# Altium PCB AX5043_module_pcb.PcbDoc
Units mm, origin at the board's own origin, x right, y up, seen from the top; angles counter-clockwise.
Board outline 60.1 x 40.1 mm, 2 copper layers (Top Layer, Bottom Layer); 59 components, 36 nets, 173 pads, 25 vias.
Unrouted connection lines stored in the file: 6.
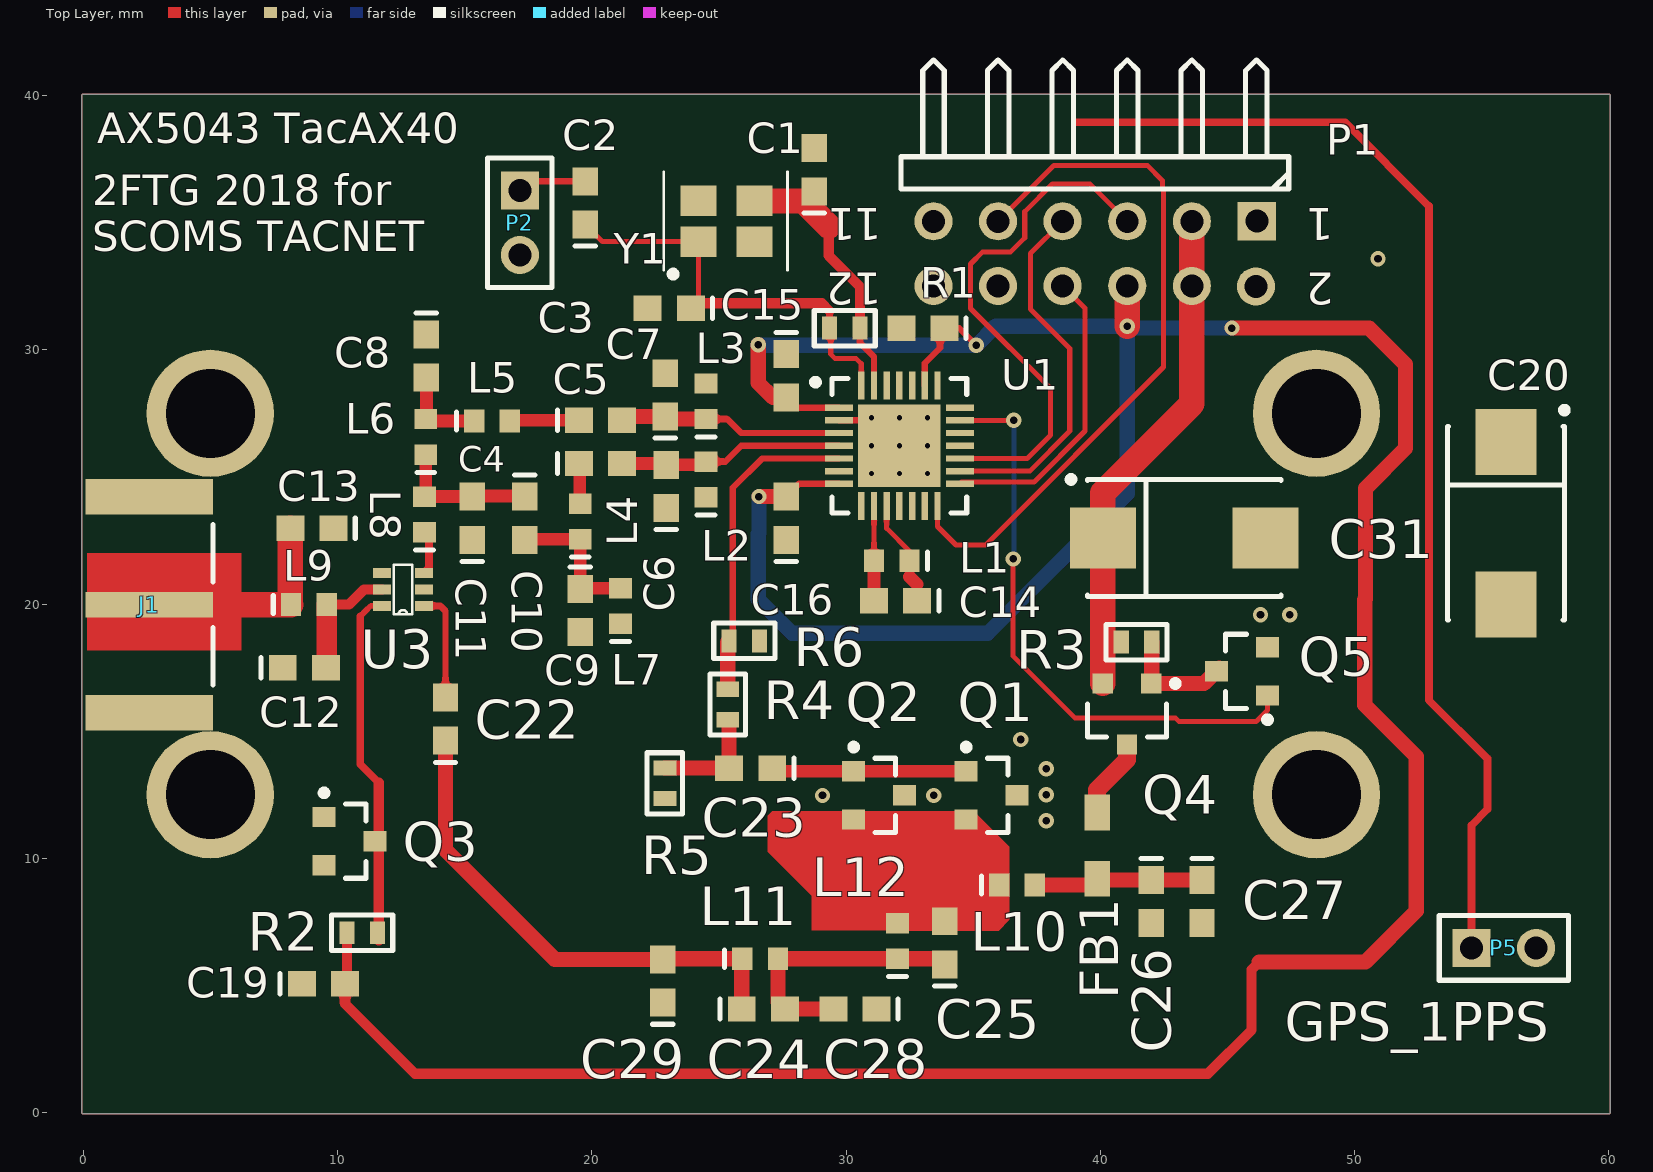
[diagram p0: Top Layer view]
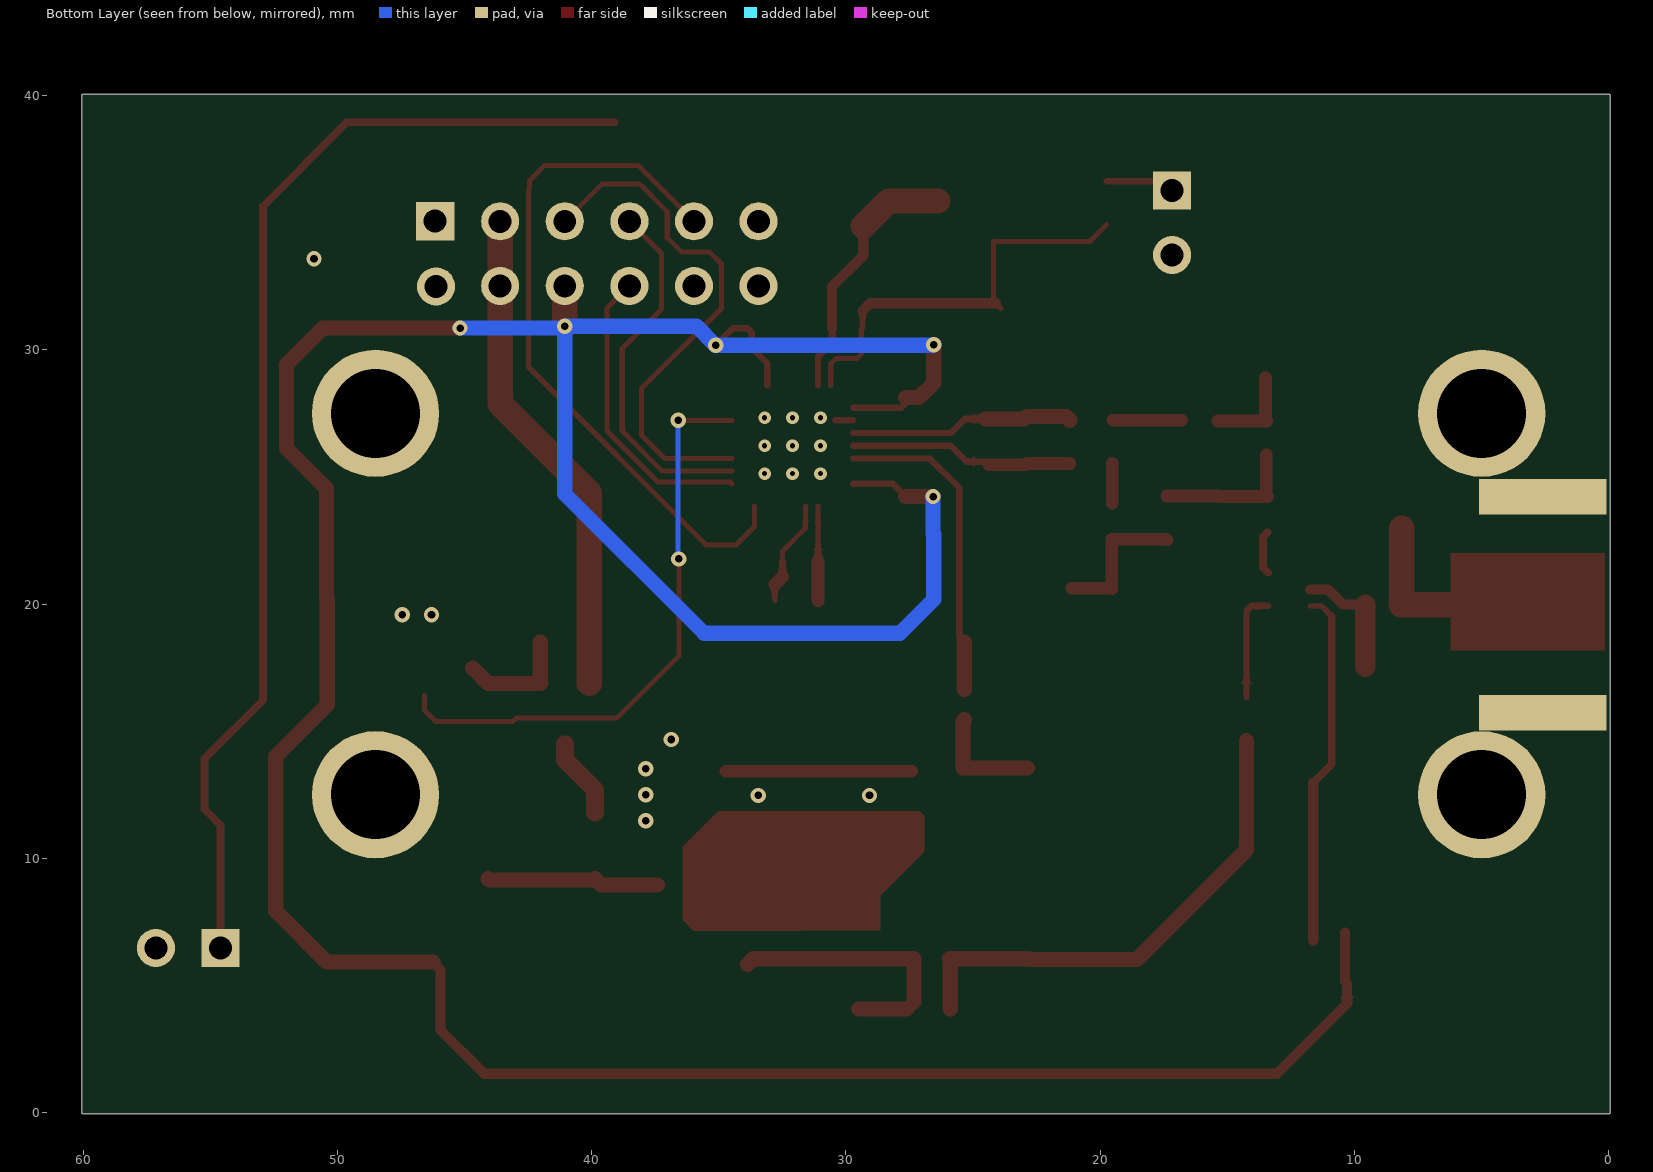
[diagram p1: Bottom Layer view, seen from below]

## Layer stack, top to bottom
Top Solder: solder mask 0.0102, Solder Resist, Dk 3.5
Top Layer: signal copper 0.0356
Dielectric 1: dielectric 0.32, FR-4, Dk 4.8
Bottom Layer: signal copper 0.0356
Bottom Solder: solder mask 0.0102, Solder Resist, Dk 3.5

## Board outline
-0.05,0 ccw(c0,0) 0,-0.05 60,-0.05 ccw(c60,0) 60.05,0 60.05,40 ccw(c60,40) 60,40.05 0,40.05 ccw(c0,40) -0.05,40

## Design rules (kind name [scope] priority, off if disabled: settings)
Clearance [All] p1: gap=0.2 ignorepadtopadclearanceinfootprint=FALSE
PolygonConnect [All] p1: connectstyle=Relief reliefconductorwidth=0.254 reliefentries=4 polygonreliefangle="90 Angle" airgapwidth=0.254
RoutingVias [All] p1: holewidth=0.3 width=0.6 viastyle="Through Hole" minholewidth=0.3 minwidth=0.6 maxholewidth=0.711 maxwidth=1.27
SolderMaskExpansion [All] p1: expansion=0.102
Width [All] p1: maxlimit=4 minlimit=0.15 preferedwidth=0.25
30 further rules are at their usual default settings.

## Classes and differential pairs
component class AX5043_schema: C1 C2 C3 C4 C5 C6 C7 C8 C9 C10 C11 C12 C13 C14 C15 C16 C19 C20 C22 C30 J1 J3 L1 L2 L3 L4 L5 L6 L7 L8 L9 P1 P2 P5 Q3 R1 R2 R4 R5 R6 U1 U3 Y1
component class 40MHz_PA: C23 C24 C25 C26 C27 C28 C29 C31 FB1 L10 L11 L12 Q1 Q2 Q4 Q5 R3

## Components (designator, comment, footprint, x,y, rotation, side; value= is the part's Value field where it differs from the comment)
C1 "C0603" 0603 28.75,37.075 r90 top value=1nF
C2 "C0603" 0603 19.75,35.775 r90 top value=1nF
C3 "C0603" 0603 23.05,31.625 r180 top value=6.8pF
C4 "C0603" 0603 20.35,25.525 r0 top value=10pF
C5 "C0603" 0603 20.35,27.225 r0 top value=10pF
C6 "C0603" 0603 22.925,24.625 r90 top value=10pF
C7 "C0603" 0603 22.9,28.225 r90 top value=10pF
C8 "C0603" 0603 13.5,29.75 r270 top value=12pF
C9 "C0603" 0603 19.55,19.75 r270 top value=0pF
C10 "C0603" 0603 17.375,23.375 r270 top value=12pF
C11 "C0603" 0603 15.3,23.375 r90 top value=75pF
C12 "C0603" 0603 8.7,17.5 r0 top value=100pF
C13 "C0603" 0603 9,22.975 r180 top value=100pF
C14 "C0603" 0603 31.95,20.125 r180 top value=100pF
C15 "C0603" 0603 27.65,28.975 r270 top value=100nF
C16 "C0603" 0603 27.65,23.375 r90 top value=100nF
C19 "C0603" 0603 9.45,5.075 r0 top value=100nF
C20 "T495D" D 55.95,23.175 r270 top value=15uF
C22 "C0603" 0603 14.25,15.475 r90 top value=1nF
C23 "C0603" 0603 26.25,13.55 r180 top value=100nF
C24 "C0603" 0603 26.75,4.075 r0 top value=22pF
C25 "C0603" 0603 33.875,6.675 r90 top value=47pF
C26 "C0603" 0603 42,8.3 r270 top value=100nF
C27 "C0603" 0603 44,8.3 r270 top value=100nF
C28 "C0603" 0603 30.35,4.075 r180 top value=100pF
C29 "C0603" 0603 22.8,5.175 r90 top value=100pF
C30 "C0603" 0603 33.025,30.85 r180 top value=100nF
C31 "T495D" D 43.3,22.6 r0 top value=15uF
FB1 "BLM21BD221SN1D" MURA-BLM21-H1-CHIP-2_V 39.875,10.5 r270 top
J1 "32K145-400L5" ROS-32K145-400L5_V 0.1,19.975 r90 top locked
L1 "Inductor" INDC1608L 31.8,21.7 r180 top value=120nH
L2 "Inductor" INDC1608L 24.5,24.9 r90 top value=150nH
L3 "Inductor" INDC1608L 24.5,27.975 r90 top value=150nH
L4 "Inductor" INDC1608L 19.55,23.25 r90 top value=120nH
L5 "Inductor" INDC1608L 16.075,27.2 r0 top value=120nH
L6 "Inductor" INDC1608L 13.475,26.575 r90 top value=68nH
L7 "Inductor" INDC1608L 21.125,19.925 r90 top value=120nH
L8 "Inductor" INDC1608L 13.425,23.525 r90 top value=270nH
L9 "Inductor" INDC1608L 8.875,19.975 r0 top value=180nH
L10 "Inductor" INDC1608L 36.725,8.95 r0 top value=1uH
L11 "Inductor" INDC1608L 26.625,6.05 r0 top value=150nH
L12 "Inductor" INDC1608L 32.025,6.75 r90 top value=21nH
P1 "Side header" HDR2X6H 46.14,35.05 r180 top
P2 "Header 2" HDR1X2 17.175,36.265 r270 top
P5 "GPS_1PPS" HDR1X2 54.6,6.475 r0 top
Q1 "BSS138LT3G" ONSC-SOT-23-3-318-08_V 35.725,12.475 r0 top
Q2 "BSS138LT3G" ONSC-SOT-23-3-318-08_V 31.3,12.475 r0 top
Q3 "BSS138LT3G" ONSC-SOT-23-3-318-08_V 10.475,10.675 r0 top
Q4 "AO3401A" AO-SOT-23-3L_V 41.05,15.675 r270 top
Q5 "BSS138LT3G" ONSC-SOT-23-3-318-08_V 45.575,17.35 r180 top
R1 "1k 0603" R0603 29.95,30.85 r0 top
R2 "10k" R0603 10.975,7.075 r180 top
R3 "100k" R0603 41.425,18.5 r180 top
R4 "0R" R0603 25.35,16.05 r270 top
R5 "100k" R0603 22.875,12.95 r90 top
R6 "100k" R0603 26,18.55 r180 top
U1 "AX5043-1-TA05" QFN50P500X500X85_HS-29M 32.1,26.225 r0 top
U3 "AS213-92LF" SC70_6 13.4,19.925 r180 top
Y1 "16MHz SMD xtal" FA-238 24.2,34.25 r0 top

## Footprints (in the part's own frame and the unit in brackets; to place one, negate y for a bottom-side part, rotate by r counter-clockwise, add the part's x,y. Pads: shape width x height; smd on the part's side, far side on the other; paste and mask are expansions set on the pad)
0603 [mm] "Chip Capacitor; Body 1.6 x 0.8 mm (LxW typ)"
  rect 1.1x1 smd: 1(-0.85,0) 2(0.85,0)
  silkscreen extent -1.7,-0.4 -1.7,0.4
AO-SOT-23-3L_V [mm] "SOT23, 3-Leads, Body 3.1x1.8mm, Pitch 0.95mm"
  rect 0.8x0.8 smd: 1(-1.2,0.95) 2(-1.2,-0.95) 3(1.2,0)
  silkscreen extent -1.32,-1.55 0.9,2.03, body extent -1.5,-1.55 1.5,1.55, height 1.25
D [mm] "Capacitor, SM Tantalum; Body 7.3 x 4.3 mm (LxW typ)"
  rect 2.6x2.4 smd: 1(-3.2,0) 2(3.2,0)
  silkscreen extent -4.57,-2.3 3.8,2.43
FA-238 [mm] "EPSON 3.20 x 2.50 SMD crystal case"
  rect 1.4x1.2 smd: 1(0,0) 2(2.2,0) 3(2.2,1.6) 4(0,1.6)
  silkscreen extent -1.38,-1.4 3.5,2.75
HDR1X2 [mm] "Connector; Header; 2 Position"
  rect 1.5x1.5 hole 0.9: 1(0,0)
  round 1.5 hole 0.9: 2(2.54,0)
  silkscreen extent -1.27,-1.27 3.81,1.27
HDR2X6H [mm] "Connector; Header; 6x2 Position; Right Angle"
  rect 1.5x1.5 hole 0.9: 1(-0.015,-0.005)
  round 1.5 hole 0.9: 2(0.02,2.56) 3(2.54,0) 4(2.54,2.54) 5(5.08,0) 6(5.08,2.54) 7(7.62,0) 8(7.62,2.54) 9(10.16,0) 10(10.16,2.54) 11(12.7,0) 12(12.7,2.54)
  silkscreen extent -1.27,-6.35 13.97,-1.27
INDC1608L [mm] "Chip Inductor, Body 1.6x0.8mm, IPC High Density"
  rect 0.8x0.9 smd: 1(-0.7,0) 2(0.7,0)
  silkscreen extent -1.4,-0.35 -1.4,0.35, body extent -0.87,-0.48 0.87,0.48, height 0.55
MURA-BLM21-H1-CHIP-2_V [mm] "Chip Ferrite Bead, 2-Leads, Body 2x1.25mm, Height 1.05mm"
  rect 1.4x1 smd: 1(-1.3,0) 2(1.3,0)
  body extent -1,-0.63 1,0.63, height 1.05
ONSC-SOT-23-3-318-08_V [mm] "SOT23, 3-Leads, Body 2.92x1.3mm, Pitch 0.95mm"
  rect 0.9x0.8 smd: 1(-1,0.95) 2(-1,-0.95) 3(1,0)
  silkscreen extent -1.12,-1.46 0.65,2.02, body extent -0.65,-1.46 0.65,1.46, height 1.11
QFN50P500X500X85_HS-29M [mm] "QFN, 28-Leads, Body 5,00x5,00mm, Pitch 0,50mm, Thermal Pad 3,25x3,25mm, IPC Low Density"
  rect 1.1x0.25 smd: 1(-2.375,1.5) 2(-2.375,1) 3(-2.375,0.5) 4(-2.375,0) 5(-2.375,-0.5) 6(-2.375,-1) 7(-2.375,-1.5) 15(2.375,-1.5) 16(2.375,-1) 17(2.375,-0.5) 18(2.375,0) 19(2.375,0.5) 20(2.375,1) 21(2.375,1.5)
  rect 0.25x1.1 smd: 8(-1.5,-2.375) 9(-1,-2.375) 10(-0.5,-2.375) 11(0,-2.375) 12(0.5,-2.375) 13(1,-2.375) 14(1.5,-2.375) 22(1.5,2.375) 23(1,2.375) 24(0.5,2.375) 25(0,2.375) 26(-0.5,2.375) 27(-1,2.375) 28(-1.5,2.375)
  rect 3.25x3.25 smd: 29(0,0)
  silkscreen extent -3.42,-2.65 2.65,2.65, body extent -2.55,-2.55 2.55,2.55, height 0.85
R0603 [mm]
  rect 0.6x0.9 smd: 1(-0.6,0) 2(0.6,0)
  silkscreen extent -1.2,-0.7 1.2,0.7
ROS-32K145-400L5_V [mm] "SMA Right Angle Jack, Edge Mount, 14.25x9.5x4.46mm, Rosenberger Recommended"
  rect 1x5 smd: 1(0,-2.5)
  rect 1.4x5 smd: MP(-4.25,-2.5) MP(4.25,-2.5)
  rect 1.4x5 smd far side paste-2: ""(-4.25,-2.5) ""(4.25,-2.5)
  silkscreen extent -3.15,-5 3.15,-5, body extent -4.75,-4.75 4.75,9.5, height 4.46
SC70_6 [mm]
  rect 0.7x0.4 smd: 1(0,0) 2(0,-0.65) 3(0,-1.3) 4(1.65,-1.3) 5(1.65,-0.65) 6(1.65,0)
  silkscreen extent 0.47,-1.63 1.18,0.33

## Part data
C1 C2 C3 C4 C5 C6 C7 C8 C9 C10 C11 C12 C13 C14 C15 C16 C19 C22 C23 C24 C25 C26 C27 C28 C29 C30: "Ceramic Chip Capacitor - Standard", PackageDocument=Mar-2001, Code_IPC="1608 [0603]", Code_JEITA=0603, ComponentLink1Description="Manufacturer Link", ComponentLink1URL=http://www.kemet.com/, ComponentLink2Description=Datasheet, ComponentLink2URL=http://www.kemet.com/kemet/web/homepage/kechome.nsf/vapubfilesname/F3102TA.pdf/$file/F3102TA.pdf, DatasheetDocument=Mar-2001, LatestRevisionDate=19-Mar-2004, LatestRevisionNote="Silkscreen size reduced.", Note="Footprint corresponds to dimensions for bulk cassette packaging. This case size has tightened tolerances.", PackageReference=0603, Published=17-Jul-2002, Publisher="Altium Limited"
C20 C31: "Solid Tantalum Chip Capacitor, Standard T495 Series - Low ESR, Surge Robust", PackageDocument=Mar-2001, Code_JEITA=7343-31, ComponentLink1Description="Manufacturer Link", ComponentLink1URL=http://www.kemet.com/, ComponentLink2Description=Datasheet, ComponentLink2URL=http://www.kemet.com/kemet/web/homepage/kechome.nsf/vapubfilesname/F3102TA.pdf/$file/F3102TA.pdf, DatasheetDocument=Mar-2001, LatestRevisionDate=19-Mar-2004, LatestRevisionNote="Silkscreen dimensions re-sized.", PackageReference=D, Published=17-Jul-2002, Publisher="Altium Limited"
FB1: library part CMP-0686-00656-2, "Chip Ferrite Bead for High Speed Signal lines, 220 Ohm, 200 mA, -55 to 125 degC, 2 x 1.25 x 1.05 mm SMD, Tape and Reel", DC Resistance="0.25 Ohm Max.", Manufacturer=Murata, Operating Temperature Range="-55 to 125 degC", Rated Current="200 mA", ComponentLink1Description="Manufacturer URL", ComponentLink1URL=http://www.murata.com/, ComponentLink2Description=Datasheet, ComponentLink2URL=http://www.murata.com/products/catalog/pdf/c31e.pdf, ComponentLink3Description="Package Specification", ComponentLink3URL=http://www.murata.com/products/catalog/pdf/c31e.pdf, DatasheetVersion=08/2013, Impedance (at 100 MHz)="220 Ohm +/- 25%", Mounting Technology="Surface Mount", PackageDescription="2-Pin Chip, Body 2 x 1.25 mm", PackageReference=BLM21_H1050-2, Packing="Tape and Reel", PartNumber=BLM21BD221SN1D
J1: "SMA Right Angle Jack, Edge Mount, Up to 18 GHz, -55 to 155 degC", ComponentLink1Description="Manufacturer URL", ComponentLink1URL=http://www.rosenberger.de, ComponentLink2Description=Datasheet, ComponentLink2URL=http://rosenberger.de/ok/images/documents/db/32K145-400L5.pdf, ComponentLink3Description="Package Specification", ComponentLink3URL=http://rosenberger.de/ok/images/documents/db/32K145-400L5.pdf, ComponentLink4Description="Series Overview / Design Note", ComponentLink4URL=http://rosenberger.de/ok/images/documents/spez/32.pdf, ComponentLink5Description="Webshop / RFQ", ComponentLink5URL=http://www.rosenberger.com/en/contact/sales/, DatasheetVersion=b00, Desgin Note 2="For more information about DRC setting, please look at following webpage, http://techdocs.altium.com/display/SCRT/Design+Rule+for+Edge-Mount+Connectors", Design Note 1="Footprint in library is a generic example - only application specific footprint delivers High Performance", Mounting Technology="Surface Mount", PackageDescription="SMA Right Angle Jack, Edge Mount, 14.25 x 9.5 x 4.46 mm", PackageReference=32K145-400L5, PackageVersion=b00, PartNumber=32K145-400L5
P1: library part "Header 6X2H", "Header, 6-Pin, Dual row, Right Angle", LatestRevisionDate=17-Jul-2002, LatestRevisionNote="Re-released for DXP Platform.", Publisher="Altium Limited"
P2: "Header, 2-Pin", LatestRevisionDate=17-Jul-2002, LatestRevisionNote="Re-released for DXP Platform.", Publisher="Altium Limited"
P5: library part "Header 2", "Header, 2-Pin", LatestRevisionDate=17-Jul-2002, LatestRevisionNote="Re-released for DXP Platform.", Publisher="Altium Limited"
Q1 Q2 Q3 Q5: library part CMP-1058-00765-1, "Power MOSFET, 200 mA, 50 V, N-Channel, 3-Pin SOT-23, Pb-Free, Tape and Reel", Manufacturer="On Semiconductor", Package Type=SOT-23-3, Channel Polarity="N Channel", Ciss Typ (pF)=40, ComponentLink1Description="Manufacturer URL", ComponentLink1URL=http://www.onsemi.com/, ComponentLink2Description=Datasheet, ComponentLink2URL=http://www.onsemi.com/pub_link/Collateral/BSS138LT1-D.PDF, ComponentLink3Description="Package Specification", ComponentLink3URL=http://www.onsemi.cn/pub_link/Collateral/318-08.PDF, Configuration=Single, Coss Typ (pF)=12, Crss Typ (pF)=3.5, DatasheetVersion="Rev. 8", ID Max (A)=0.2, Mounting Technology="Surface Mount", PackageDescription="3-Pin Small Outline Transistor, Body 2.92 x 1.3 mm, Pitch 0.95 mm", PackageReference=SOT-23-3-318-08, PackageVersion="Rev. AP, 11/2009", Packing="Tape and Reel", PartNumber=BSS138LT3G, PD Max (W)=0.225, RoHS=Pb-Free, V(BR)DSS Min (V)=50, VGS(th) Max (V)=1.5, VGS Max (V)=20
Q4: library part CMP-2000-05778-1, "P-Channel MOSFET, 30 V, 4 A, -55 to 150 degC, 3-Pin SOT-23-3L, RoHS, Tape and Reel", Continuous Drain Current=4A, Drain-Source On-Volt=30V, Frequency (Max)=NotRequiredMHz, Gate-Source Voltage (Max)=?12V, Manufacturer="Alpha and Omega", Operating Temperature Classification=Military, Operating Temp Range=-55Cto150C, Output Power (Max)=NotRequiredW, Package Description="3-Pin Small Outline Transistor, Body 2.95 x 1.6 mm, Pitch 0.95 mm", Package Reference=SOT-23-3L, Package Type=SOT-23, Power Dissipation=1.4W, Power Gain=NotRequireddB, Channel Mode=Enhancement, Datasheet URL=http://www.aosmd.com/res/data_sheets/AO3401A.pdf, Datasheet Version="Rev. 3, 03/2011", Drain-Source On-Res=0.044ohm, Drain Current (Max)=4A, Drain Efficiency=NotRequired%, Manufacturer URL=http://www.aosmd.com/, Mounting=SurfaceMount, Mounting Technology=SurfaceMount, Noise Figure=NotRequireddB, Number of  Elements=1, Package URL=http://www.aosmd.com/res/packaging_information/SOT-23-3L.pdf, Pin Count=3, Polarity=P, Rad Hardened=No, Type=PowerMOSFET
R2 R3 R4 R5 R6: library part "1k 0603"
U1: library part AX5043, "Data Tranceiver 27-1050MHz Separate TX/RX ports", Case/Package=QFN, Current - Receiving=11mA, Current - Transmitting=48mA, Frequency=27MHz, Manufacturer="ON Semiconductor", Max Frequency=1.05GHz, Max Operating Temperature=85°C, Max Supply Voltage=3.6V, Min Operating Temperature=-40°C, Min Supply Voltage=1.8V, ComponentLink1Description=http://www.mouser.com/ds/2/308/AX5043-D-782042.pdf, ComponentLink1URL=http://www.mouser.com/ds/2/308/AX5043-D-782042.pdf, ComponentLink2Description=http://www.onsemi.com/pub_link/Collateral/AX5043-D.PDF, ComponentLink2URL=http://www.onsemi.com/pub_link/Collateral/AX5043-D.PDF, ComponentLink3Description=http://www.farnell.com/datasheets/2009298.pdf, ComponentLink3URL=http://www.farnell.com/datasheets/2009298.pdf, ComponentLink4Description=http://www.onsemi.com/pub/Collateral/AX5043-D.PDF, ComponentLink4URL=http://www.onsemi.com/pub/Collateral/AX5043-D.PDF, Data Rate=125Kbps, Interface=SPI,UART, Lead Free="Lead Free", Manufacturer Part Number=AX5043-1-TA05, Mount="Surface Mount", Number of Pins=28, Packaging="Tape and Reel", REACH SVHC="No SVHC", Sensitivity=-137dBm, Stock 1=3949, Supplier 1=Mouser
U3: "Switch SPDT 0.1-3GHZ GAAS SC70-6", Frequency - Lower=100MHz, Frequency - Upper=3GHz, Insertion Loss @ Frequency="0.5dB @ 3GHz", Isolation @ Frequency="19dB @ 3GHz (typ)", Manufacturer 1="Skyworks Solutions Inc.", Operating Temperature="-40°C ~ 85°C", Package / Case="6-TSSOP, SC-88, SOT-363", Supplier Device Package=SC-70-6, Supplier Part Number 1=863-1238-1-ND, Voltage - Supply=3V, Category="RF/IF and RFID", Circuit=SPDT, ComponentLink1Description=http://www.skyworksinc.com/uploads/documents/200193D.pdf, ComponentLink1URL=http://www.skyworksinc.com/uploads/documents/200193D.pdf, Features=-, IIP3="40dBm (typ)", Impedance="50 Ohm", Manufacturer Part Number 1=AS213-92LF, P1dB="27dBm (typ) IP1dB", Packaging="Cut Tape (CT)", Pricing 1="1=0.41, 100=0.3393 (EUR)", RF Type="Bluetooth, WLAN", RoHS="RoHS Compliant", Stock 1=26253, Supplier 1=Digi-Key, Topology=Reflective
Y1: library part FA-238_16.0000MB-C3, "16MHz SMD xtal 3.20mm x 2.50mm", Case/Package=SMD/SMT, ESR (Equivalent Series Resistance)=80R, Frequency=16MHz, Frequency Stability=30ppm, Frequency Tolerance=50ppm, Load Capacitance=18pF, Manufacturer=Epson, Manufacturer Part Number=FA-23816.0000MB-C3, Max Operating Temperature=70°C, Min Operating Temperature=-20°C, Package Quantity=250, Supplier Part Number 1=SER3686CT-ND, ComponentLink1Description=http://www.eea.epson.com/portal/pls/portal/docs/1/1531444.PDF, ComponentLink1URL=http://www.eea.epson.com/portal/pls/portal/docs/1/1531444.PDF, ComponentLink2Description=http://www.mouser.com/ds/2/137/A-238_en-932914.pdf, ComponentLink2URL=http://www.mouser.com/ds/2/137/A-238_en-932914.pdf, Height=0.028inch, Lead Free="Lead Free", Length=0.126inch, Mount="Surface Mount", Packaging="Tape and Reel", Stock 1=19537, Supplier 1=Digi-Key, Termination=SMD/SMT, Tolerance=50ppm, Weight=0.000564oz, Width=0.098inch
L1 L2 L3 L4 L5 L6 L7 L8 L9 L10 L11 L12: Code_IEC=1005, Code_JEITA=0402, LatestRevisionDate=29-May-2009, LatestRevisionNote="IPC-7351 Footprint Added.", PackageDescription="Chip Inductor", PackageReference=0402-A, Published=8-Jun-2000, Publisher="Altium Limited"

## Free pads (board coordinates)
  round 5 hole 3.5: 5(5,12.5) 6(5,27.5) 7(48.5,27.5) 8(48.5,12.5)

## Via types
v1: diameter 0.6, hole 0.3, Top Layer to Bottom Layer, 16 vias
v2: diameter 0.5, hole 0.2, Top Layer to Bottom Layer, 9 vias

## Nets (pads, with @x,y where several pads share a name; then routed paths per layer and width w, separated by ;. In a path a pad name is that pad's centre, name@x,y a point inside that pad or via, vN(x,y) a via of type N, cw(c..) or ccw(c..) an arc to the next point about the centre after c; other vN are vias at no path point)
3.3VDC: C15.2 C16.2 C19.2 C20.1 C30.1 P1.6 R2.2 U1.1 U1.7 U1.23 | length 141.7
  Top Layer w0.25: C19.2 C19.2@10.375,5.15 ; v1@26.4,24.25 26.425,24.225 v1(26.575,24.225) ; C16.2 28.15,24.725 U1.7 ; C15.2@27.65,27.9 27.825,27.725 U1.1 ; U1.23 33.1,29.475 33.7,30.075 33.7,30.675 C30.1 34.45,30.85 v1(35.125,30.175)
  Top Layer w0.4: C19.2 10.3,4.275 13.05,1.525 44.225,1.525 45.95,3.25 45.95,5.625 46.25,5.925 46.245,5.93 ; C19.2@10.375,5.15 R2.2
  Top Layer w0.6: v1(26.55,30.2) 26.55,28.7 27.125,28.125 C15.2 ; v1(26.575,24.225) C16.2 ; v1(45.175,30.85) 50.575,30.85 52,29.425 52,26.125 50.425,24.55 50.425,20.194 50.4,20.169 50.4,16.025 52.425,14 52.425,7.925 50.425,5.925 46.25,5.925
  Top Layer w1: v1(41.06,30.925) P1.6
  Bottom Layer w0.6: v1(26.55,30.2) 26.575,30.175 v1(35.125,30.175) 35.875,30.925 v1(41.06,30.925) ; v1(26.575,24.225) 26.575,22.775 26.55,22.75 26.55,20.175 27.875,18.85 35.575,18.85 41.06,24.335 v1(41.06,30.925) ; v1(45.175,30.85) 41.135,30.85 v1(41.06,30.925)
ANTN: C4.2 C6.2 L2.2 U1.4 | length 8.9
  Top Layer w0.25: C6.2@22.875,25.525 C6.2 ; L2.2@24.375,25.475 L2.2 25.25,25.6 25.875,26.225 U1.4
  Top Layer w0.5: C4.2 C6.2@22.875,25.525 ; C6.2 L2.2@24.375,25.475
ANTP: C5.2 C7.1 L3.1 U1.3 | length 8.9
  Top Layer w0.25: L3.1 25.325,27.275 25.875,26.725 U1.3
  Top Layer w0.6: C5.2 21.35,27.375 C7.1 23,27.275 L3.1
ANTSEL: U1.21
CLK: P1.8 U1.15 | length 11.9
  Top Layer w0.2: U1.15 34.55,24.8 37.4,24.8 39.4,26.8 39.4,31.63 P1.8
GND: C1.2 C3.2 C6.1 C7.2 C8.1 C9.2 C11.1 C12.1 C13.1 C15.1 C16.1 C19.1 C20.2 C26.2 C27.2 C28.1 C29.1 C30.2 C31.2 J1.MP L2.1 L3.2 L7.1 P1.1 P1.2 P1.12 P2.2 P5.2 Q1.3 Q2.3 Q3.2 Q5.2 R5.1 R6.1 U1.2 U1.6 U1.29 U3.2 Y1.2 Y1.4 | length 0.7
  Top Layer w0.25: U1.2 30.425,27.225
  other v1: 37.875,11.475 29.075,12.475 33.45,12.475 37.875,12.5 37.875,13.525 36.875,14.675 46.3,19.575 47.45,19.575 50.92,33.58
MISO: P1.7 U1.16 | length 14.4
  Top Layer w0.2: U1.16 37.225,25.225 38.8,26.8 38.8,30.05 37.25,31.6 37.25,33.78 P1.7
MOSI: P1.5 U1.17 | length 20.7
  Top Layer w0.2: U1.17 37.125,25.725 38.05,26.65 38.05,28.475 34.9,31.625 34.9,33.375 35.375,33.85 36.475,33.85 37.03,34.405 37.03,35.43 38.125,36.525 39.585,36.525 P1.5
NetC1_1: C1.1 R1.2 U1.27 Y1.3 | length 10.6
  Top Layer w0.25: R1.2 30.55,30.275 31.1,29.725 U1.27
  Top Layer w0.4: 29.325,35.105 29.325,34.85 29.325,33.7 30.55,32.475 R1.2
  Top Layer w1: Y1.3 28.325,35.85 29.325,34.85
NetC2_1: C2.1 C3.1 R1.1 U1.28 Y1.1 | length 16.8
  Top Layer w0.2: C2.1 20.425,34.25 Y1.1 24.2,31.925 24.1,31.825 C3.1 ; 29.35,31.525 R1.1 29.4,30.8 29.4,29.825 29.575,29.65 30.4,29.65 30.6,29.45 U1.28
  Top Layer w0.4: C3.1@24.1,31.825 29.05,31.825 29.35,31.525
NetC2_2: C2.2 P2.1 | length 3.4
  Top Layer w0.254: P2.1@16.725,36.625 P2.1@17.115,36.625 ; P2.1 17.115,36.325 P2.1@17.115,36.625 ; C2.2 P2.1@17.115,36.625
NetC4_1: C4.1 L4.2 | length 1.6
  Top Layer w0.254: L4.2@19.525,23.975 L4.2
  Top Layer w0.5: L4.2@19.525,23.975 C4.1@19.525,25.525
NetC5_1: C5.1 L5.2 | length 2.7
  Top Layer w0.254: L5.2 L5.2@16.8,27.225
  Top Layer w0.5: L5.2@16.8,27.225 C5.1
NetC8_2: C8.2 L5.1 L6.2 | length 3.6
  Top Layer w0.254: L6.2@13.45,27.2 L6.2@13.5,27.25
  Top Layer w0.5: L6.2@13.45,27.2 L5.1 ; L6.2@13.5,27.25 C8.2
NetC9_1: C9.1 C10.2 L4.1 L7.2 | length 5.7
  Top Layer w0.5: C10.2 17.4,22.55 L4.1 C9.1 19.575,20.625 L7.2
NetC10_1: C10.1 C11.2 L6.1 L8.2 | length 5.6
  Top Layer w0.5: L6.1 13.475,24.275 L8.2 C11.2 15.325,24.25 C10.1@17.375,24.25
NetC12_2: C12.2 L9.2 U3.5 | length 4.9
  Top Layer w0.3: C12.2 C12.2@9.575,17.525
  Top Layer w0.4: L9.2 10.45,19.975 11.05,20.575 U3.5
  Top Layer w0.8: C12.2@9.575,17.525 L9.2
NetC13_2: C13.2 J1.1 L9.1 | length 8.6
  Top Layer w1: J1.1 L9.1 8.15,20 C13.2
NetC14_1: C14.1 L1.1 U1.10 | length 4.2
  Top Layer w0.2: U1.10 31.6,22.975 32.5,22.075 L1.1 ; C14.1 32.8,20.775
  Top Layer w0.25: 32.5,21.075 L1.1
  Top Layer w0.5: 32.5,21.075 32.8,20.775
NetC14_2: C14.2 L1.2 U1.9 | length 3.7
  Top Layer w0.2: L1.2 U1.9
  Top Layer w0.5: C14.2 L1.2
NetC22_1: C22.1 C24.1 C29.2 L11.1 | length 19.8
  Top Layer w0.25: L11.1@25.9,6.025 L11.1
  Top Layer w0.6: C22.1 14.25,10.325 18.55,6.025 C29.2 22.825,6.05 L11.1 ; C24.1 L11.1@25.9,6.025
NetC22_2: C22.2 U3.1 | length 4.3
  Top Layer w0.25: C22.2 14.25,19.725
  Top Layer w0.254: U3.1 14.05,19.925 14.25,19.725
NetC23_1: C23.1 Q1.1 Q2.1 | length 7.3
  Top Layer w0.5: C23.1@27.425,13.425 28.675,13.425 Q2.1 Q1.1
NetC23_2: C23.2 R4.2 R5.2 | length 4.4
  Top Layer w0.6: R5.2 C23.2 25.4,15.4 R4.2
NetC24_2: C24.2 C25.1 C28.2 L11.2 L12.1 | length 10.6
  Top Layer w0.25: C24.2@27.325,4.35 C24.2
  Top Layer w0.6: C24.2@27.325,4.35 L11.2 L12.1 33.65,6.05 C25.1 ; C24.2 C28.2
NetC25_2: C25.2 L10.1 L12.2 Q1.2 Q2.2 | length 12.5
  Top Layer w0.55: Q2.2 33.925,11.525 Q1.2
  Top Layer w0.6: L12.2 32.1,7.525 C25.2 33.875,8.775 ; 33.925,11.525 33.875,11.475 33.875,8.775 ; L10.1@36,8.95 34.05,8.95 33.875,8.775
NetC26_1: C26.1 C27.1 FB1.2 L10.2 | length 6.8
  Top Layer w0.6: L10.2 39.625,8.95 FB1.2 39.925,9.15 C26.1 C27.1 44.03,9.15 C27.1@44.075,9.195
NetFB1_1: FB1.1 Q4.3 | length 3.2
  Top Layer w0.7: FB1.1 39.875,12.7 41.05,13.875 Q4.3
NetL8_1: L8.1 U3.3 | length 1.8
  Top Layer w0.3: U3.3 13.6,21.425 13.6,22.65 L8.1
NetP1_10: P1.10 P5.1 | length 45.6
  Top Layer w0.3: 39.1,38.95 49.625,38.95 52.925,35.65 52.925,16.225 55.225,13.925 55.225,11.925 54.6,11.3 P5.1
NetQ4_1: Q4.1 Q5.3 R3.1 | length 4.6
  Top Layer w0.6: R3.1 42.025,16.9 Q4.1 44.075,16.875 Q5.3@44.675,17.475
NetR4_1: R4.1 R6.2 U1.5 | length 12.7
  Top Layer w0.25: R6.2@25.35,18.5 R6.2 25.55,18.7 25.55,24.575 26.7,25.725 U1.5
  Top Layer w0.6: R4.1 R6.2@25.35,18.5
RX_EN: Q3.3 R2.1 U3.6 | length 14.1
  Top Layer w0.2: 10.9,19.525 11.3,19.925 U3.6
  Top Layer w0.3: 10.9,19.525 10.9,13.7 11.625,12.975
  Top Layer w0.4: R2.1@11.625,6.775 11.625,12.975
SEL: P1.9 U1.14 | length 27.9
  Top Layer w0.2: U1.14 33.6,23.05 34.325,22.325 35.491,22.325 42.485,29.319 42.485,36.287 42.45,36.321 42.45,36.65 41.85,37.25 38.18,37.25 P1.9
TX_EN: Q3.1 Q5.1 U1.20 U3.4 | length 23.3
  Top Layer w0.2: U1.20 v1(36.6,27.225) ; v1(36.575,21.775) 36.575,17.95 39,15.525 42.95,15.525 43.1,15.375 46.125,15.375 46.575,15.825 Q5.1
  Bottom Layer w0.2: v1@36.6,21.725 v1(36.6,27.225)
VCC_BATT: C31.1 P1.3 P1.4 Q4.2 R3.2 | length 19.6
  Top Layer w1: Q4.2 C31.1 40.1,24.375 43.6,27.875 P1.4 P1.3
pads on no net: J1. P1.11 U1.8 U1.11 U1.12 U1.13 U1.18 U1.19 U1.22 U1.24 U1.25 U1.26
copper on no net:
  other v2: 31,25.125 32.1,25.125 33.2,25.125 31,26.225 32.1,26.225 33.2,26.225 31,27.325 32.1,27.325 33.2,27.325

## Polygon pours and split planes (outlines as drawn)
GND on Top Layer "Top Layer-GND" (solid, shelved, pour order 2): -0.05,0 ccw(c0,0) 0,-0.05 60,-0.05 ccw(c60,0) 60.05,0 60.05,40 ccw(c60,40) 60,40.05 0,40.05 ccw(c0,40) -0.05,40
GND on Bottom Layer "Bottom Layer - GND " (solid, shelved, pour order 3): -0.05,0 ccw(c0,0) 0,-0.05 60,-0.05 ccw(c60,0) 60.05,0 60.05,40 ccw(c60,40) 60,40.05 0,40.05 ccw(c0,40) -0.05,40

## Other copper
Top Layer:
  rectangle net NetC13_2: 0.15,18.175 6.225,22
  region net NetC25_2: 31.7,7.15 31.675,7.175 28.65,7.175 28.65,8.525 26.925,10.25 26.925,11.675 27.1,11.85 35.025,11.85 36.425,10.45 36.425,7.575 36,7.15

## Silkscreen, mask and mechanical layers (free items; w line width, h text height)
Top Overlay:
  text "AX5043 TacAX40" at 0.55,38.125 h1.2
  text "2FTG 2018 for  / SCOMS TACNET" at 0.35,33.875 h1.2
  text "GPS_1PPS" at 47.25,2.825 h1.52
Mechanical 1:
  lines w0.1: 0,0 60,0 60,40 0,40 0,22 0,18 0,0
Mechanical 3:
  lines w0.013: 1.5,12.5 8.5,12.5 ; 1.5,27.5 8.5,27.5 ; 5,9 5,16 ; 5,24 5,31 ; 45,12.5 52,12.5 ; 45,27.5 52,27.5 ; 48.5,9 48.5,16 ; 48.5,24 48.5,31
Mechanical 4:
  circle w0.013: c48.5,27.5 r1.75
  circle w0.013: c48.5,12.5 r1.75
  circle w0.013: c5,12.5 r1.75
  circle w0.013: c5,27.5 r1.75
  lines w0.013: 0,9.5 5,9.5 ccw(c5,12.5) 7.538,10.9 ; 0,18 5,18 ; 0,22 5,22 ; 0,30.5 5,30.5 cw(c5,27.5) 7.538,29.1 45.962,29.1 ; 5,18.4 60,18.4 ; 5,21.6 60,21.6 ; 9.95,10.9 48.375,10.9 ; 45.962,10.9 ccw(c48.5,12.5) 48.5,9.5 60,9.5 ; 48.5,30.5 60,30.5 ; 60,15.5 48.5,15.5 ccw(c48.5,12.5) 45.962,14.1 7.538,14.1 ccw(c5,12.5) 5,15.5 5,18 ; 60,24.5 48.5,24.5 cw(c48.5,27.5) 45.962,25.9 7.538,25.9 cw(c5,27.5) 5,24.5 5,22 ; 5,18 5,22
Mechanical 5:
  lines w0.013: 171.885,70.038 173.385,70.038 ; 171.885,73.038 173.385,73.038 ; 172.385,102.288 173.385,102.288

## Text inside footprints (layer, text, board x,y; h text height)
J1: Mechanical 3 "Board Edge" at 0.1,11.875 h0.2 r90
P1: Top Overlay "12" at 31.408,33.018 h1.27 r180; Top Overlay "1" at 30.392,35.558 h1.27 r180; Top Overlay "1" at 31.408,35.558 h1.27 r180; Top Overlay "1" at 49.188,35.558 h1.27 r180; Top Overlay "2" at 49.188,33.018 h1.27 r180